# Altium PCB Main.PcbDoc
Units mil, origin at the board's own origin, x right, y up, seen from the top; angles counter-clockwise.
Board outline 6000 x 4000 mil, 2 copper layers (Top Layer, Bottom Layer); 44 components, 35 nets, 139 pads, 0 vias.
Unrouted connection lines stored in the file: 89.
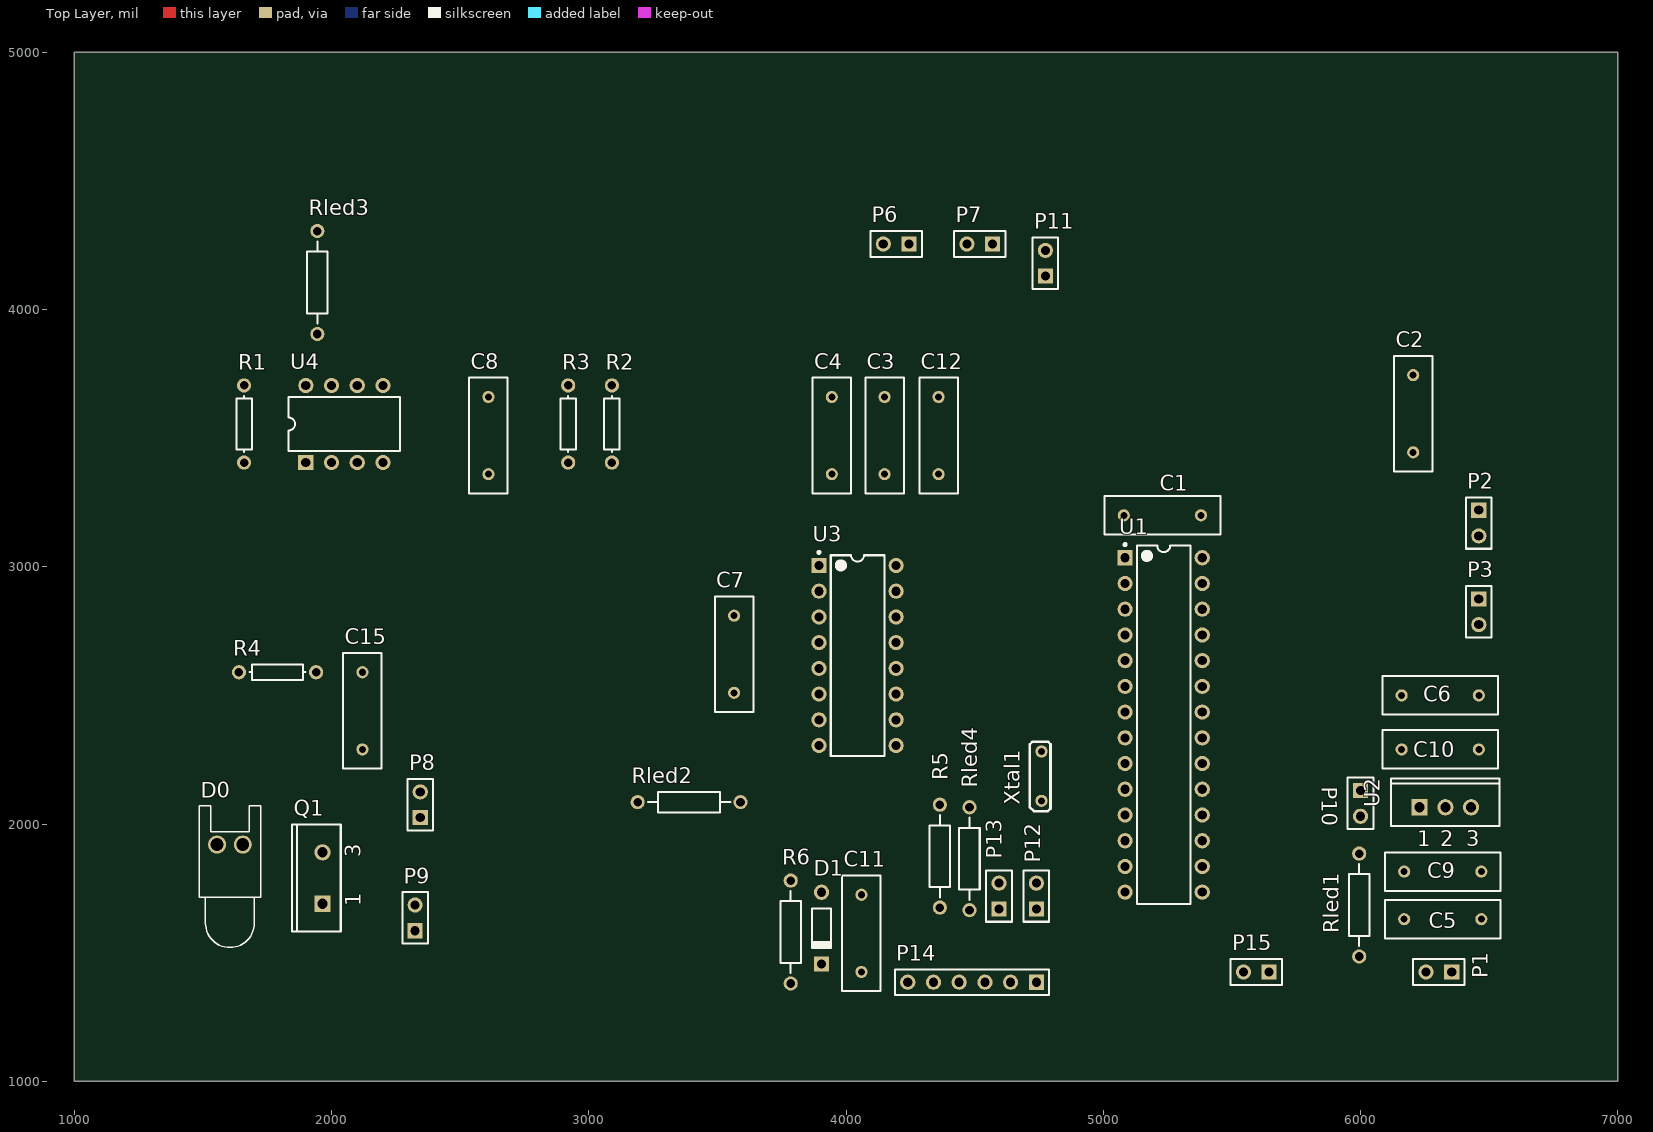
[diagram p0: Top Layer view]
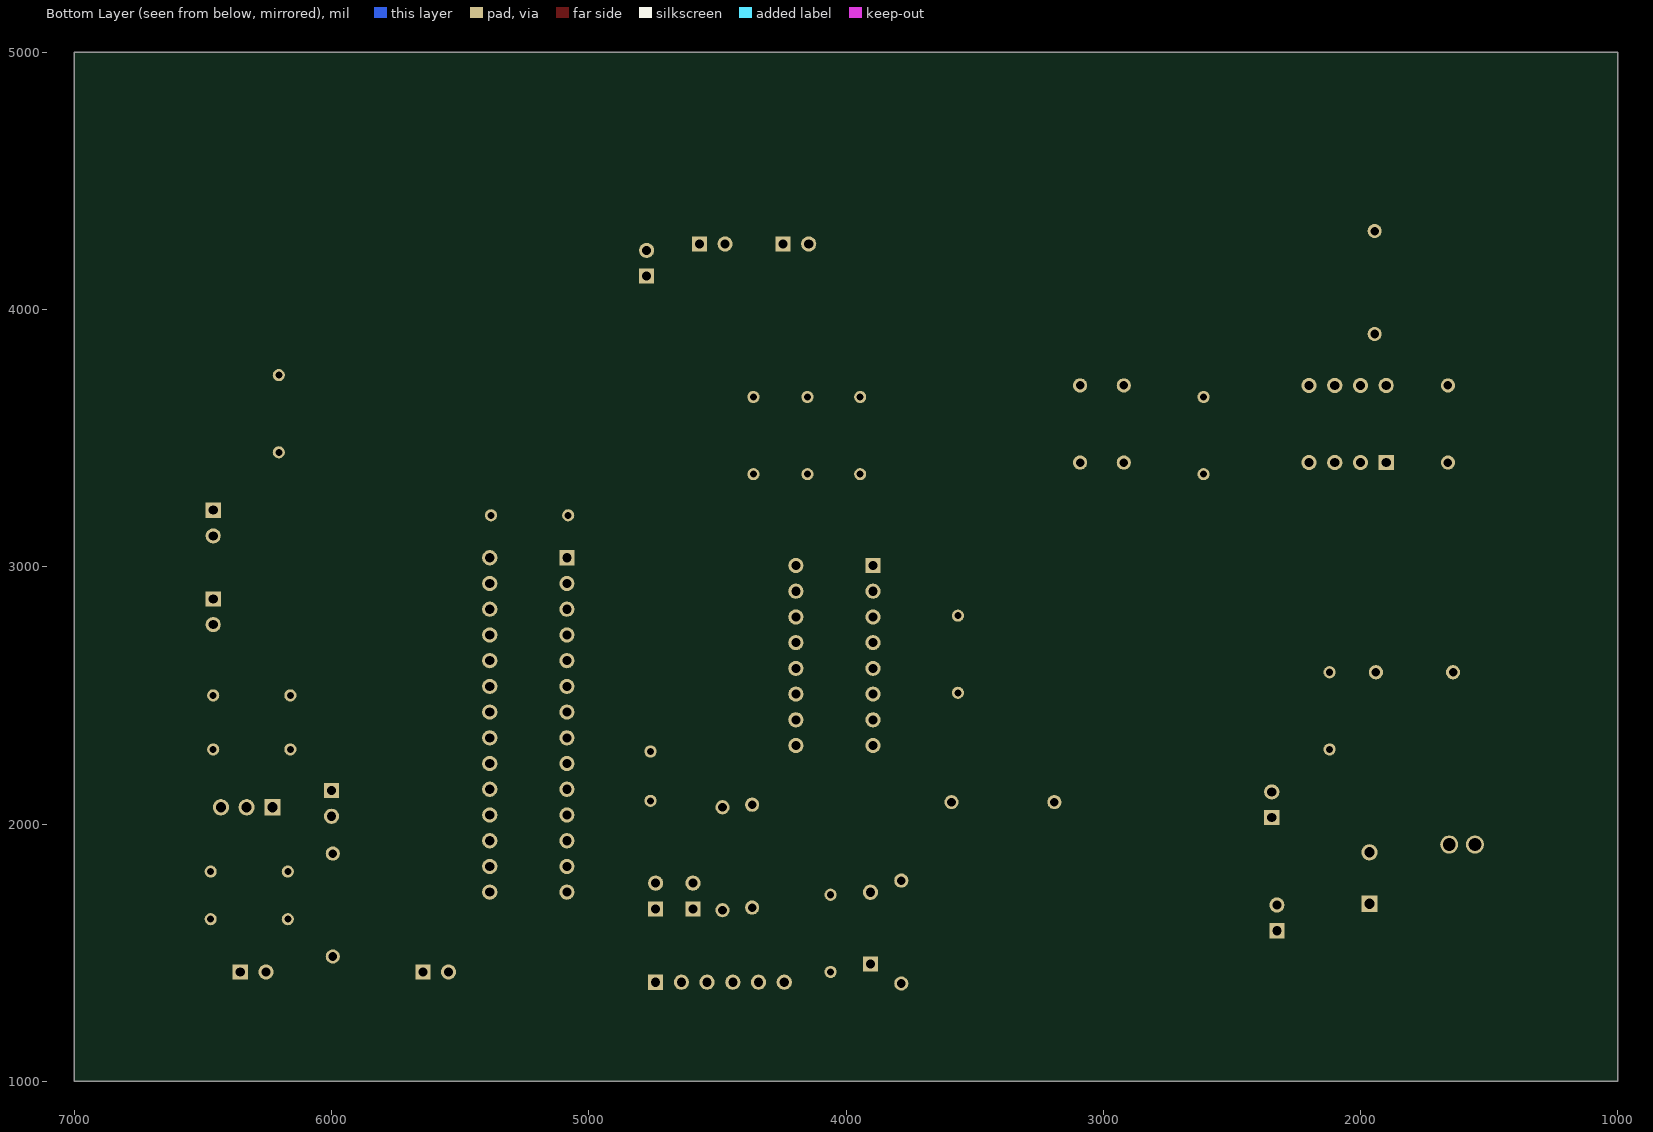
[diagram p1: Bottom Layer view, seen from below]

## Layer stack, top to bottom
Top Layer: signal copper 1.4
Dielectric: dielectric 12.6, FR-4, Dk 4.8
Bottom Layer: signal copper 1.4

## Board outline
1000,1000 7000,1000 7000,5000 1000,5000

## Design rules (kind name [scope] priority, off if disabled: settings)
Clearance [All] p1: gap=10
PolygonConnect [All] p1: connectstyle=Relief reliefconductorwidth=10 reliefentries=4 polygonreliefangle="90 Angle" airgapwidth=10
RoomDefinition All [All] p1: confinementstyle=ConfineIn formatcopy=TRUE lockcomponents=FALSE outline 1420,1310 6555,1310 6555,4465 1420,4465
RoutingVias [All] p1: holewidth=28 width=50 viastyle="Through Hole" minholewidth=28 minwidth=50 maxholewidth=28 maxwidth=50
SolderMaskExpansion [All] p1: expansion=4
Width [All] p1: maxlimit=10 minlimit=10 preferedwidth=10
28 further rules are at their usual default settings.

## Classes and differential pairs
component class Perifericos: C11 D1 P1 P2 P3 P6 P7 P8 P9 P10 P11 P12 P13 P14 P15 R5 R6 Rled1 Rled2 Rled3 Rled4
component class Gral: C1 C2 C3 C4 C5 C6 C7 C8 C9 C10 C12 C15 D0 Q1 R1 R2 R3 R4 U1 U2 U3 U4 Xtal1

## Components (designator, comment, footprint, x,y, rotation, side; value= is the part's Value field where it differs from the comment)
C1 "Cap" RAD-0.3 5230,3200 r0 top
C2 "Cap" RAD-0.3 6205,3595 r90 top
C3 "Cap" RAD-0.3 4150,3510 r90 top
C4 "Cap" RAD-0.3 3945,3510 r90 top
C5 "Cap" RAD-0.3 6320,1630 r180 top
C6 "Cap" RAD-0.3 6310,2500 r0 top
C7 "Cap" RAD-0.3 3565,2660 r90 top
C8 "Cap" RAD-0.3 2610,3510 r90 top
C9 "Cap" RAD-0.3 6320,1815 r180 top
C10 "Cap" RAD-0.3 6310,2290 r0 top
C11 "Cap" RAD-0.3 4060,1575 r270 top
C12 "Cap" RAD-0.3 4360,3510 r90 top
C15 "Cap" RAD-0.3 2120,2440 r90 top
D0 "" LED-0 1605,1920 r0 top
D1 "Diode 1N4148" DO-35 3905,1595 r270 top
P1 "Header 2" HDR1X2 6355,1425 r180 top
P2 "Header 2" HDR1X2 6460,3220 r270 top
P3 "Header 2" HDR1X2 6460,2875 r270 top
P6 "Header 2" HDR1X2 4245,4255 r180 top
P7 "Header 2" HDR1X2 4570,4255 r180 top
P8 "Header 2" HDR1X2 2345,2025 r90 top
P9 "Header 2" HDR1X2 2325,1585 r90 top
P10 "Header 2" HDR1X2 6000,2130 r270 top
P11 "Header 2" HDR1X2 4775,4130 r90 top
P12 "Header 2" HDR1X2 4740,1670 r90 top
P13 "Header 2" HDR1X2 4595,1670 r90 top
P14 "Header 6" HDR1X6 4740,1385 r180 top
P15 "Header 2" HDR1X2 5645,1425 r180 top
Q1 "Photo NPN" TO-220_A 1965,1790 r90 top
R1 "Res1" AXIAL-0.3 1660,3555 r90 top
R2 "Res1" AXIAL-0.3 3090,3555 r90 top
R3 "Res1" AXIAL-0.3 2920,3555 r90 top
R4 "Res1" AXIAL-0.3 1790,2590 r180 top
R5 "Res2" AXIAL-0.4 4365,1875 r270 top
R6 "Res2" AXIAL-0.4 3785,1580 r90 top
Rled1 "Res2" AXIAL-0.4 5995,1685 r90 top
Rled2 "Res2" AXIAL-0.4 3390,2085 r180 top
Rled3 "Res2" AXIAL-0.4 1945,4105 r90 top
Rled4 "Res2" AXIAL-0.4 4480,1865 r90 top
U1 "ATmega328P-PU" 28P3 5235,2385 r0 top
U2 "LM2930-8KC" KC03 6330,2065 r0 top
U3 "L293NE" NE016 4045,2655 r0 top
U4 "LM358AP" P008 2050,3555 r0 top
Xtal1 "Xtal" Xtal 4760,2090 r90 top

## Footprints (in the part's own frame and the unit in brackets; to place one, negate y for a bottom-side part, rotate by r counter-clockwise, add the part's x,y. Pads: shape width x height; smd on the part's side, far side on the other; paste and mask are expansions set on the pad)
28P3 [mm] "DIP, 28-Leads, Row Spacing 7.62mm, Pitch 2.54mm, Body 34.67x7.3mm"
  rect 1.5x1.5 hole 0.9: 1(-3.81,16.51)
  round 1.5 hole 0.9: 2(-3.81,13.97) 3(-3.81,11.43) 4(-3.81,8.89) 5(-3.81,6.35) 6(-3.81,3.81) 7(-3.81,1.27) 8(-3.81,-1.27) 9(-3.81,-3.81) 10(-3.81,-6.35) 11(-3.81,-8.89) 12(-3.81,-11.43) 13(-3.81,-13.97) 14(-3.81,-16.51) 15(3.81,-16.51) 16(3.81,-13.97) 17(3.81,-11.43) 18(3.81,-8.89) 19(3.81,-6.35) 20(3.81,-3.81) 21(3.81,-1.27) 22(3.81,1.27) 23(3.81,3.81) 24(3.81,6.35) 25(3.81,8.89) 26(3.81,11.43) 27(3.81,13.97) 28(3.81,16.51)
  silkscreen extent -3.93,-17.7 2.65,17.93, body extent -3.6,-17.65 3.6,17.65, height 4.58
AXIAL-0.3 [mm] "Axial Device, Thru-Hole; 2 Leads; 0.3 in Pin Spacing"
  round 1.4 hole 0.85: 1(-3.81,0) 2(3.81,0)
  silkscreen extent -2.77,-0.76 2.77,0.76
AXIAL-0.4 [mm] "Axial Device, Thru-Hole; 2 Leads; 0.4 in Pin Spacing"
  round 1.4 hole 0.85: 1(-5.08,0) 2(5.08,0)
  silkscreen extent -4.06,-1.02 4.06,1.02
DO-35 [mm] "Diode, Axial; Body 3.8 x 1.9 mm (LxDia. max), Lead Dia. 0.53 mm (max)"
  round 1.5 hole 0.9: 1(-3.55,0)
  rect 1.5x1.5 hole 0.9: 2(3.55,0)
  silkscreen extent -1.95,-0.95 2.05,0.95
HDR1X2 [mm] "Connector; Header; 2 Position"
  rect 1.5x1.5 hole 0.9: 1(0,0)
  round 1.5 hole 0.9: 2(2.54,0)
  silkscreen extent -1.27,-1.27 3.81,1.27
HDR1X6 [mm] "Connector; Header; 6 Position"
  rect 1.5x1.5 hole 0.9: 1(0,0)
  round 1.5 hole 0.9: 2(2.54,0) 3(5.08,0) 4(7.62,0) 5(10.16,0) 6(12.7,0)
  silkscreen extent -1.27,-1.27 13.97,1.27
KC03 [mm] "TO, Thru-Hole, Vertical, Heatsink Mounted; 3 In-Line Leads; Pitch 2.54 mm"
  rect 1.6x1.6 hole 1: 1(-2.54,0)
  round 1.6 hole 1: 2(0,0) 3(2.54,0)
  silkscreen extent -5.35,-1.85 5.35,2.85
LED-0 [mil] "LED; 2 Leads"
  round 70 hole 50: 1(50,0) 2(-50,0)
  silkscreen extent -120,-400 120,150
NE016 [mm] "DIP, 16-Leads, Row Spacing 7.62mm, Pitch 2.54mm, Body 19.4x6.35mm"
  rect 1.5x1.5 hole 0.9: 1(-3.81,8.89)
  round 1.5 hole 0.9: 2(-3.81,6.35) 3(-3.81,3.81) 4(-3.81,1.27) 5(-3.81,-1.27) 6(-3.81,-3.81) 7(-3.81,-6.35) 8(-3.81,-8.89) 9(3.81,-8.89) 10(3.81,-6.35) 11(3.81,-3.81) 12(3.81,-1.27) 13(3.81,1.27) 14(3.81,3.81) 15(3.81,6.35) 16(3.81,8.89)
  silkscreen extent -3.93,-9.9 2.65,10.31, body extent -3.3,-9.9 3.3,9.9, height 5.08
P008 [mm] "DIP; 8 Leads; Row Spacing 7.62 mm; Pitch 2.54 mm"
  rect 1.5x1.5 hole 0.9: 1(-3.81,-3.81)
  round 1.5 hole 0.9: 2(-1.27,-3.81) 3(1.27,-3.81) 4(3.81,-3.81) 5(3.81,3.81) 6(1.27,3.81) 7(-1.27,3.81) 8(-3.81,3.81)
  silkscreen extent -5.5,-2.65 5.5,2.65
RAD-0.3 [mm] "Radial Cap, Thru-Hole; 2 Leads; 0.3 in Pin Spacing"
  round 1.2 hole 0.7: 1(-3.81,0) 2(3.81,0)
  silkscreen extent -5.71,-1.91 5.71,1.91
TO-220_A [mm] "TO, Thru-Hole, Vertical, Heatsink Mounted; 3 In-Line Leads (1 Absent); Pitch 2.54 mm"
  rect 1.6x1.6 hole 1: 1(-2.54,0)
  round 1.6 hole 1: 3(2.54,0)
  silkscreen extent -5.3,-1.8 5.3,3
Xtal [mm]
  round 1.2 hole 0.7: 1(0,0) 2(4.877,0)
  silkscreen extent -1.02,-0.89 5.84,1.14

## Part data
C1 C2 C3 C4 C5 C6 C7 C8 C9 C10 C11 C12 C15: "Capacitor"
D0: library part LED0, "Typical INFRARED GaAs LED"
D1: "High Conductance Fast Diode"
P1 P2 P3 P6 P7 P8 P9 P10 P11 P12 P13 P15: "Header, 2-Pin"
P14: "Header, 6-Pin"
Q1: "NPN Phototransistor"
R1 R2 R3 R4 R5 R6 Rled1 Rled2 Rled3 Rled4: "Resistor"
U1: "8-bit AVR Microcontroller, 32KB Flash, 1KB EEPROM, 2KB SRAM, 28-pin PDIP, Industrial Grade (-40°C to 85°C)"
U2: "3-Terminal Positive Regulator"
U3: "Quadruple Half-H Driver"
U4: "Dual Operational Amplifier"

## Nets (pads, with @x,y where several pads share a name; then routed paths per layer and width w, separated by ;. In a path a pad name is that pad's centre, name@x,y a point inside that pad or via, vN(x,y) a via of type N, cw(c..) or ccw(c..) an arc to the next point about the centre after c; other vN are vias at no path point)
GND: C1.1 C2.1 C3.2 C4.2 C5.1 C6.1 C9.1 C10.1 C12.1 C15.1 P1.1 P2.1 P3.1 P14.1 P14.2 Rled1.1 Rled2.1 U1.8 U1.22 U2.2 U3.4 U3.5 U3.12 U3.13 U4.4
NetC2_2: C2.2 U1.20
NetC3_1: C3.1 U1.9 Xtal1.2
NetC4_1: C4.1 U1.10 Xtal1.1
NetC7_1: C7.1 P6.2 U3.6
NetC7_2: C7.2 P6.1 U3.3
NetC8_1: C8.1 P7.2 U3.14
NetC8_2: C8.2 P7.1 U3.11
NetC11_1: C11.1 D1.1 R6.2 U1.1
NetC11_2: C11.2 P14.6
NetC12_2: C12.2 U1.21
NetC15_2: C15.2
NetD0_1: D0.1 R3.1
NetD0_2: D0.2 Q1.3 R4.1 U4.3
NetP10_2: P10.2 Rled1.2
NetP11_2: P11.2 Rled2.2
NetP12_1: P12.1 R5.1 U1.2
NetP12_2: P12.2 Rled3.2
NetP13_1: P13.1 P14.5 U1.3
NetP13_2: P13.2 Rled4.2
NetP14_4: P14.4 R5.2
NetP15_1: P15.1 U1.23
NetP15_2: P15.2 U1.24
NetQ1_1: Q1.1 R2.1
NetR1_1: R1.1 U4.2
NetU1_4: U1.4 U4.7
NetU1_5: U1.5 U4.1
NetU1_13: U1.13 U3.2
NetU1_14: U1.14 U3.7
NetU1_16: U1.16 U3.9
NetU1_17: U1.17 U3.1
NetU1_18: U1.18 U3.10
NetU1_19: U1.19 U3.15
VCC: C1.2 C6.2 C10.2 D1.2 P2.2 P3.2 P11.1 P14.3 R1.2 R2.2 R3.2 R6.1 Rled3.1 Rled4.1 U1.7 U2.3 U3.16 U4.8
VIN: C5.2 C9.2 P1.2 P10.1 U2.1 U3.8
pads on no net: P8.1 P8.2 P9.1 P9.2 R4.2 U1.6 U1.11 U1.12 U1.15 U1.25 U1.26 U1.27 U1.28 U4.5 U4.6

## Text inside footprints (layer, text, board x,y; h text height)
Q1: Top Overlay "3" at 2113.62,1870.32 h59.06 r90; Top Overlay "1" at 2113.62,1680.16 h59.06 r90
U2: Top Overlay "2" at 6310.31,1914.41 h59.06; Top Overlay "1" at 6220.16,1914.41 h59.06; Top Overlay "3" at 6410.31,1914.41 h59.06